# EAGLE board eCog0_Blank_TH (EAGLE 6.6.0)
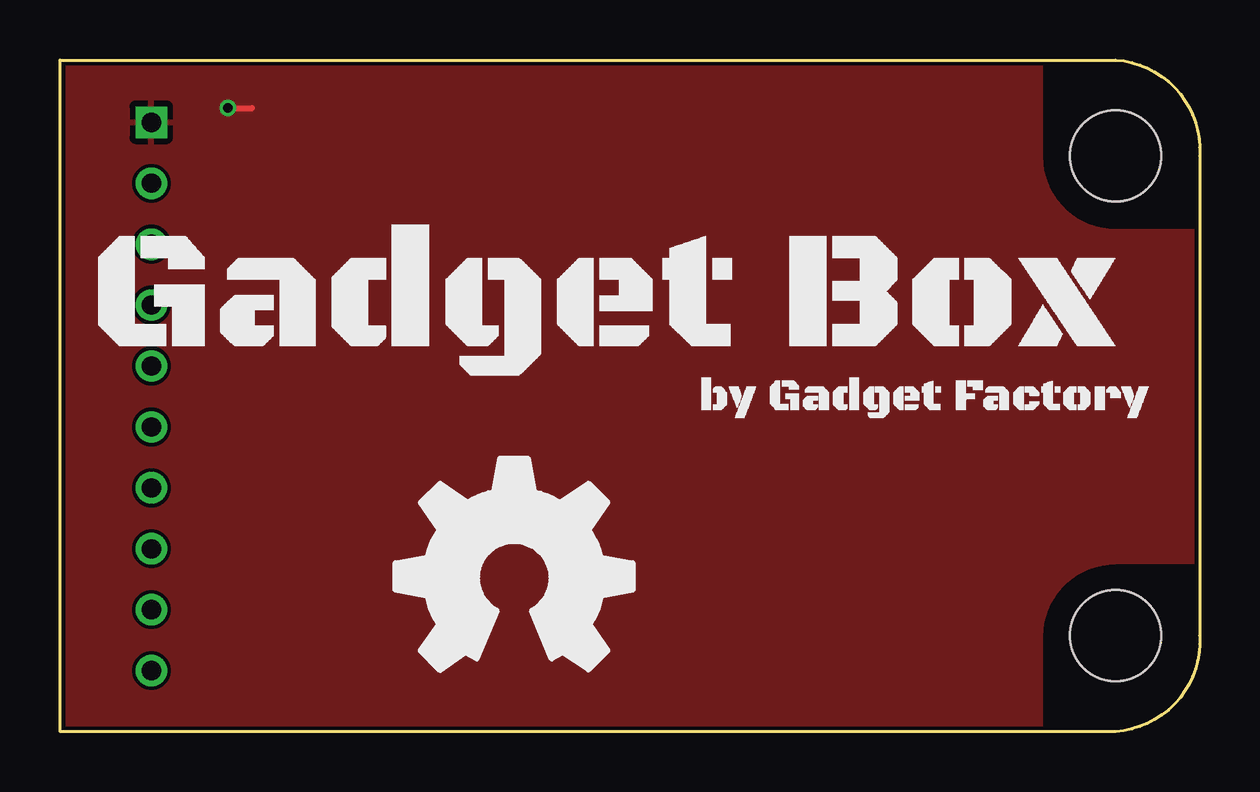
[diagram p0: board, top side]
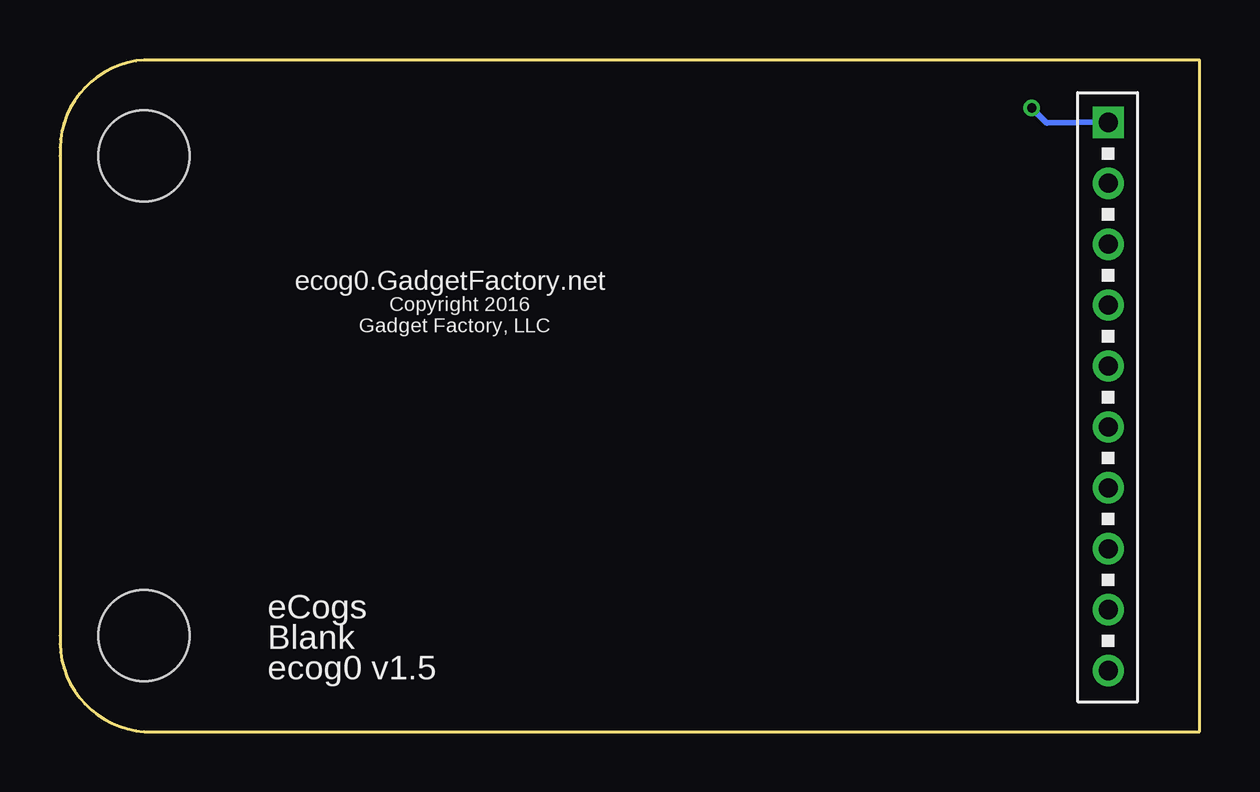
[diagram p1: board, bottom side, seen from below]

Size 47.51 x 28 mm. Coordinates in mm from the lower left corner, seen from the top.
Copper layers (1*16): Top 0.035mm / dielectric 1.5mm / Bottom 0.035mm
Design rules "hackvana *": minimum track width 6mil, minimum drill 0.3mm, track to track 6mil, track to pad 6mil, pad to pad 6mil, via to via 6mil, smd to smd 0mil, copper to edge 6mil, drill to drill 6mil, minimum pad ring 10mil, minimum via ring 6mil, stop-mask expansion 2mil, vias tented up to drill 100mil, thermal gap 10mil

## Footprints (pad centres in the part's own frame; a part is rotated, then mirrored left to right if it is on the bottom)
ECOG_GENERAL_TH = drill 0.8: 3V3 3.81,2.54; G0 3.81,22.86; G1 3.81,20.32; G2 3.81,17.78; G3 3.81,15.24; G4 3.81,12.7; G5 3.81,10.16; G6 3.81,7.62; G7 3.81,5.08 | drill 0.8 square: GND 3.81,25.4 | hole 3.8: 44,4; 44,24

## Placement (x,y rotation side)
ECOG  ECOG_GENERAL_ROWECOG_GENERAL_TH  [ECOG_GENERAL_TH]  0,0 0 top
U$1  [OSHW_FILLX350_NOTEXT]  13.97,2.54 0 top
U$2  [GADGETBOX_TEXT]  22.86,17.78 0 top

## Library data of the parts
ECOG = eCogs
U$1 = ohw-logo
U$2 = GadgetFactory

## Nets
3V3: ECOG.3V3
GND: ECOG.GND

## Tracks (layer width: path | path; a pad name or v marks a point on that pad's centre or on a via)
GND  (via drill 0.38)
  Top 0.254: v7,26 8,26
  Bottom 0.254: ECOG.GND 6.37,25.37 v7,26
  pour Top: -1,29 49,29 49,-1 -1,-1

## Text on the board
bPlace: Copyright 2016 | ecog0.GadgetFactory.net | Gadget Factory, LLC | eCogs | Blank | ecog0 v1.5